# EAGLE board main_schematic1 (EAGLE 7.1.0)
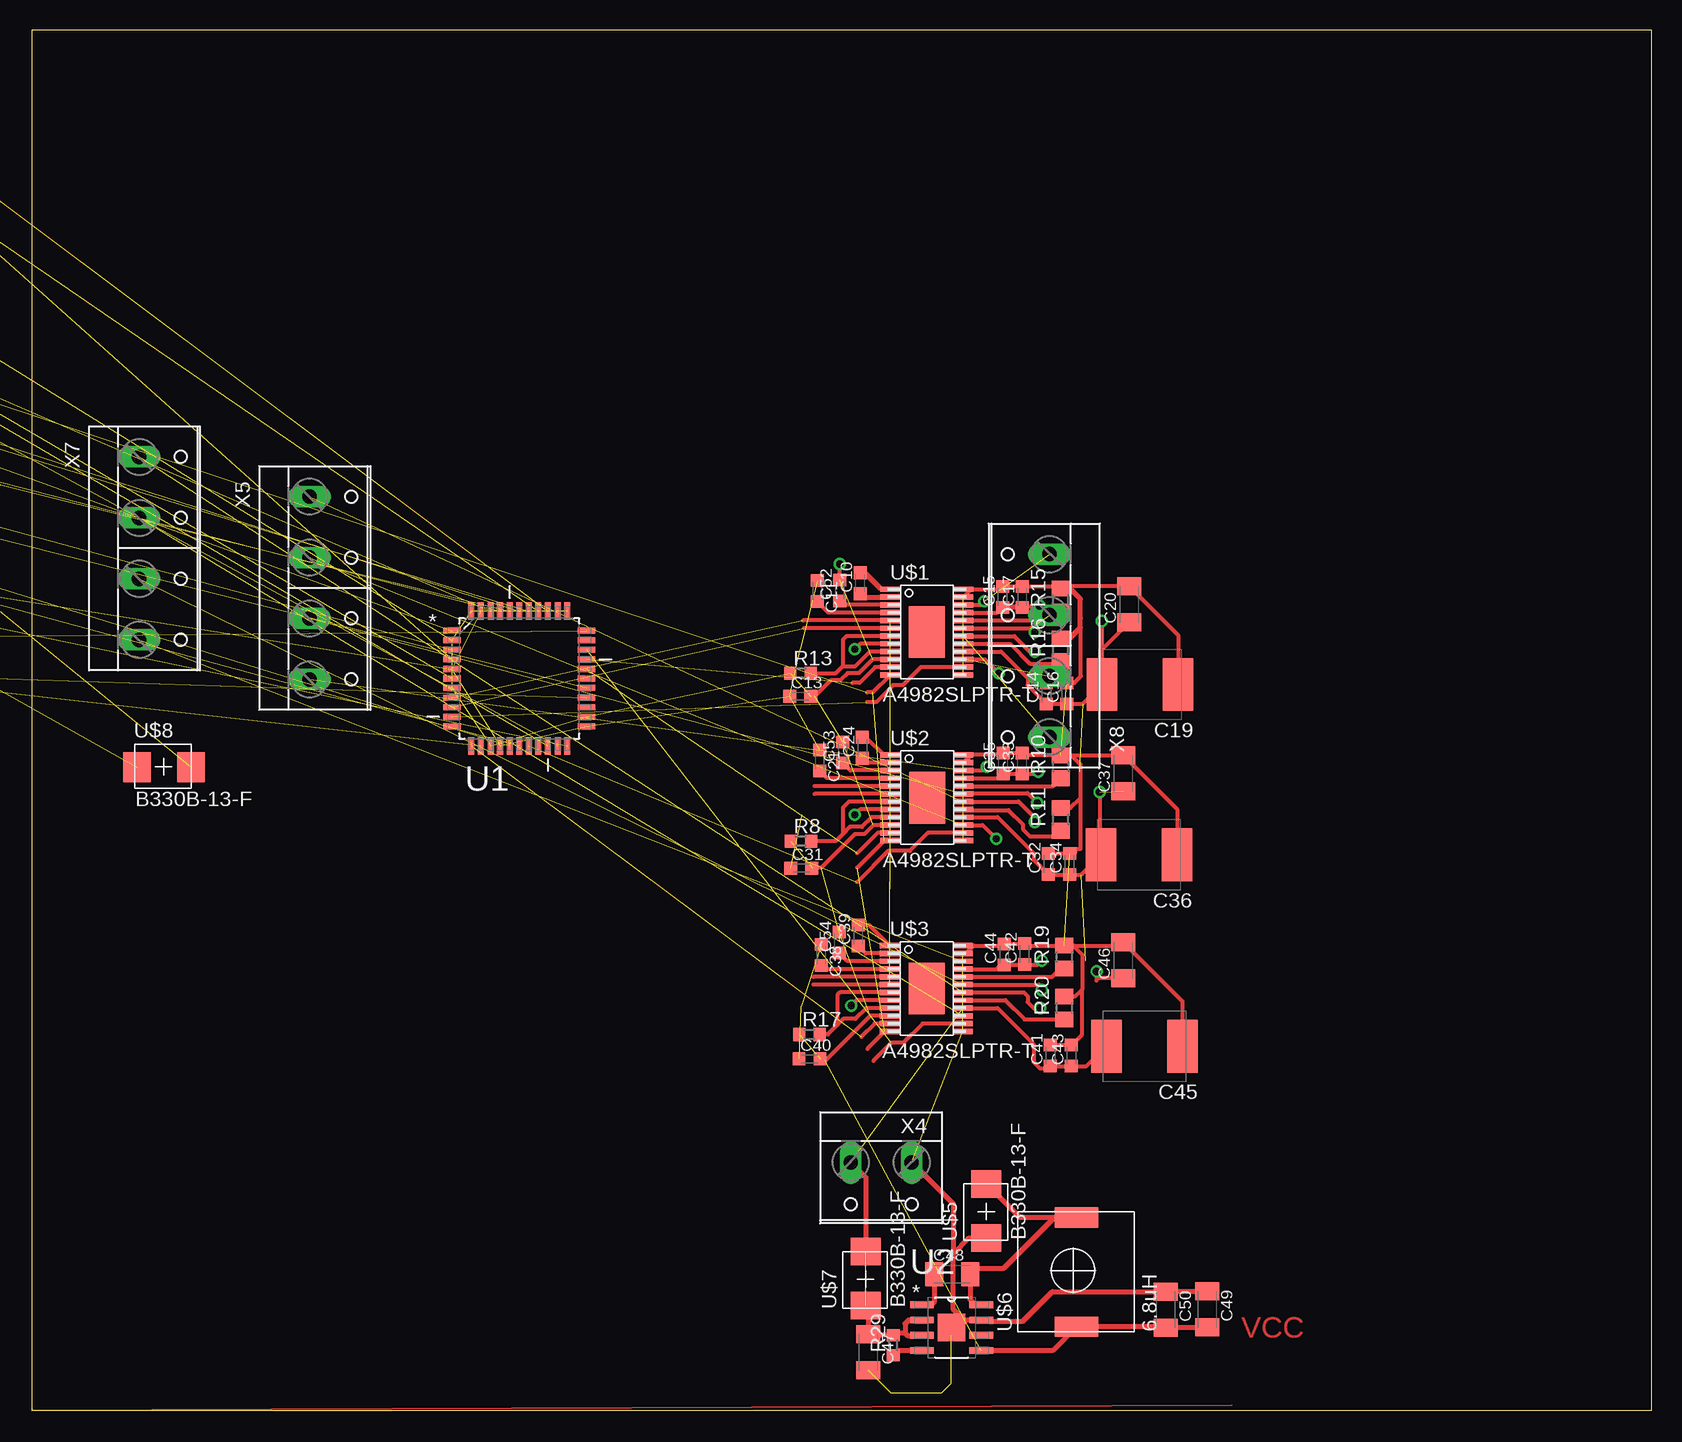
[diagram p0: board, top side]
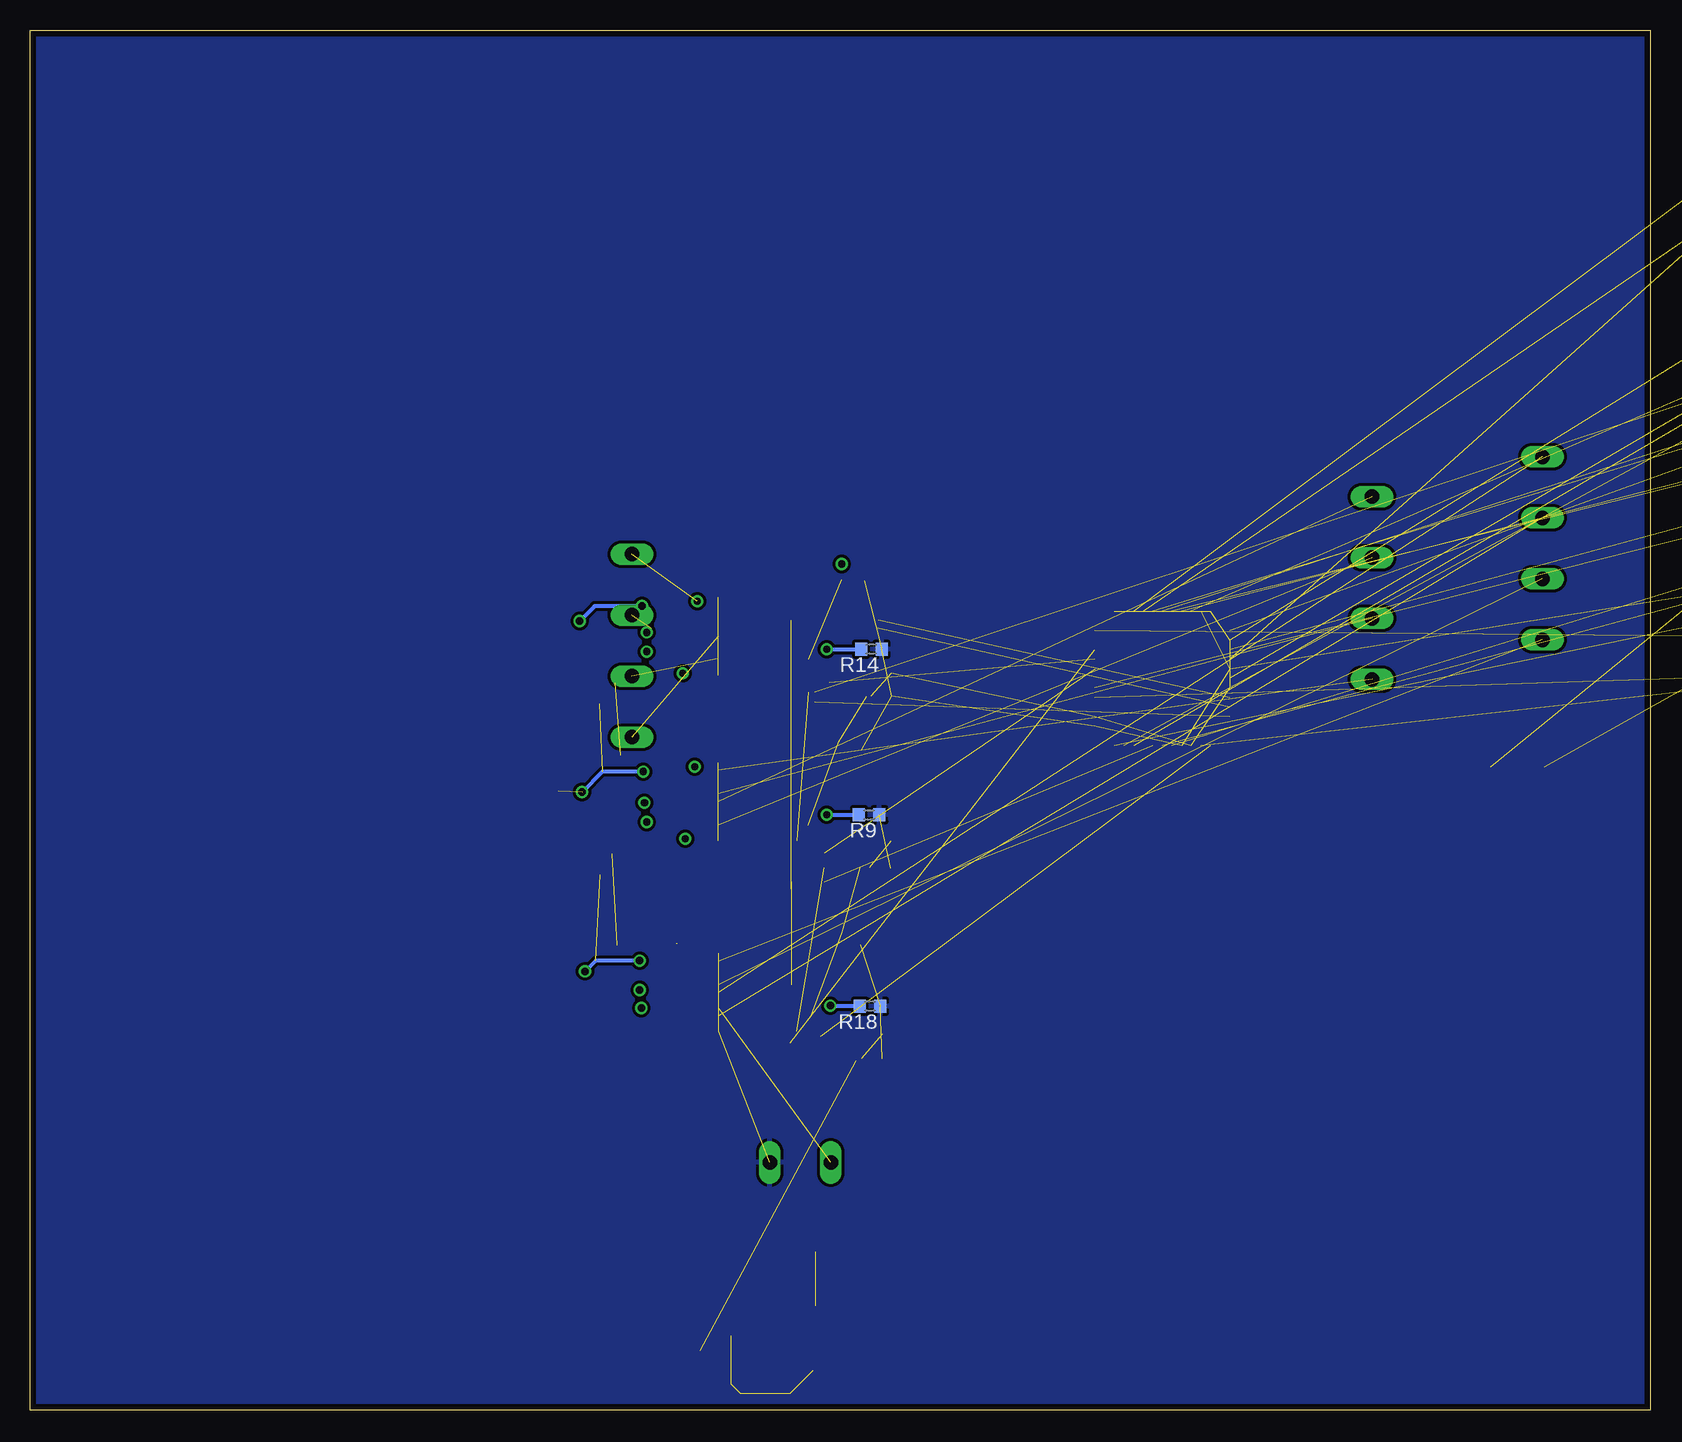
[diagram p1: board, bottom side, seen from below]

Size 135 x 115 mm. Coordinates in mm from the lower left corner, seen from the top.
Outline: 0,0 135,0 135,115 0,115 0,0
Copper layers (1*16): Top 0.035mm / dielectric 1.5mm / Bottom 0.035mm
Design rules "EDT_DRC": minimum track width 0.3mm, minimum drill 0.5mm, track to track 0.25mm, track to pad 0.25mm, pad to pad 0.25mm, via to via 0.25mm, smd to smd 0mil, copper to edge 0.5mm, drill to drill 8mil, minimum pad ring 10mil, minimum via ring 8mil, stop-mask expansion 4mil, vias tented up to drill 0mil, thermal gap 10mil

## Footprints (pad centres in the part's own frame; a part is rotated, then mirrored left to right if it is on the bottom)
C0603K = smd 1.05 x 1.08: 1 -0.875,0; 2 0.875,0
E/7260-38R = smd 2.55 x 4.4: + 3.175,0; - -3.175,0
C1206K = smd 1.5 x 2: 1 -1.5,0; 2 1.5,0
C0805 = smd 1.3 x 1.5: 1 -0.95,0; 2 0.95,0
USB-MINIB = smd 0.5 x 2.308: D+ 0,4.064; D- -0.8,4.064; GND 1.6,4.064; ID 0.8,4.064; VBUS -1.6,4.064 | smd 2 x 2.4: GND1 -4.4,-2; GND2 -4.4,3.5; GND3 4.4,3.5; GND4 4.4,-2 | hole 1: -2.2,1; 2.2,1
MC36214 = smd 1 x 2.8: P$1 0.239,1.4; P$2 3.196,1.39
1X04 = drill 1.016 long: 1 -3.81,0; 2 -1.27,0; 3 1.27,0; 4 3.81,0
1X02 = drill 1.016 long: 1 -1.27,0; 2 1.27,0
CHIP-LED0603 = smd 0.8 x 0.8: A 0,-0.75; C 0,0.75
SM49 = smd 5.08 x 1.778: 1 -4.826,0; 2 4.826,0
R0603 = smd 1 x 1.1: 1 -0.85,0; 2 0.85,0
R0805 = smd 1.3 x 1.5: 1 -0.95,0; 2 0.95,0
EVQ-Q2 = smd 3.2 x 1.2: A -3.4,-2; A' 3.4,-2; B -3.4,2; B' 3.4,2
QFP80P1200X1200X120-44N = smd 1.473 x 0.508: 1 -5.613,3.988; 2 -5.613,3.2; 3 -5.613,2.388; 4 -5.613,1.6; 5 -5.613,0.787; 6 -5.613,0; 7 -5.613,-0.787; 8 -5.613,-1.6; 9 -5.613,-2.388; 10 -5.613,-3.2; 11 -5.613,-3.988; 23 5.613,-3.988; 24 5.613,-3.2; 25 5.613,-2.388; 26 5.613,-1.6; 27 5.613,-0.787; 28 5.613,0; 29 5.613,0.787; 30 5.613,1.6; 31 5.613,2.388; 32 5.613,3.2; 33 5.613,3.988 | smd 0.508 x 1.473: 12 -3.988,-5.613; 13 -3.2,-5.613; 14 -2.388,-5.613; 15 -1.6,-5.613; 16 -0.787,-5.613; 17 0,-5.613; 18 0.787,-5.613; 19 1.6,-5.613; 20 2.388,-5.613; 21 3.2,-5.613; 22 3.988,-5.613; 34 3.988,5.613; 35 3.2,5.613; 36 2.388,5.613; 37 1.6,5.613; 38 0.787,5.613; 39 0,5.613; 40 -0.787,5.613; 41 -1.6,5.613; 42 -2.388,5.613; 43 -3.2,5.613; 44 -3.988,5.613
SOIC127P600X175-9N = smd 1.981 x 0.559: 1 -2.464,1.905; 2 -2.464,0.635; 3 -2.464,-0.635; 4 -2.464,-1.905; 5 2.464,-1.905; 6 2.464,-0.635; 7 2.464,0.635; 8 2.464,1.905 | smd 2.286 x 2.286: 9 0,0
TSSOP_24 = smd 1.65 x 0.45: P1 -3.175,3.67; P2 -3.175,3.02; P3 -3.175,2.37; P4 -3.175,1.72; P5 -3.175,1.07; P6 -3.175,0.42; P7 -3.175,-0.23; P8 -3.175,-0.88; P9 -3.175,-1.53; P10 -3.175,-2.18; P11 -3.175,-2.83; P12 -3.175,-3.48; P13 2.925,-3.48; P14 2.925,-2.83; P15 2.925,-2.18; P16 2.925,-1.53; P17 2.925,-0.88; P18 2.925,-0.23; P19 2.925,0.42; P20 2.925,1.07; P21 2.925,1.72; P22 2.925,2.37; P23 2.925,3.02; P24 2.925,3.67 | smd 3 x 4.32: P$1 -0.102,0.099
SFH6165 = smd 2.1 x 1.5: P1 -1.13,3.656; P2 -1.12,1.156; P3 7.446,1.156; P4 7.442,3.656
B330B-13-F = smd 2.3 x 2.5: P$1 -2.2,-0.022; P$2 2.299,-0.022
VLF10040 = smd 1.7 x 3.6: P$1 0.4,4.8; P$2 9.51,4.8
MICROMATCH-4 = drill 0.813: 1 1.905,1.27; 2 0.635,-1.27; 3 -0.635,1.27; 4 -1.905,-1.27
W237-132 = drill 1.194 long: 1 -2.54,-0.635; 2 2.54,-0.635
W237-4P = drill 1.194 long: 1 -7.62,-0.635; 2 -2.54,-0.635; 3 2.54,-0.635; 4 7.62,-0.635

## Placement (x,y rotation side)
C1  100nF  [C0603K]  -21.59,106.68 0 top  (outside the outline)
C2  100nF  [C0603K]  -27.94,106.68 0 top  (outside the outline)
C3  100nF  [C0603K]  -34.29,106.68 0 top  (outside the outline)
C4  100nF  [C0603K]  -40.64,106.68 0 top  (outside the outline)
C5  100nF  [C0603K]  -46.99,106.68 0 top  (outside the outline)
C6  100nF  [C0603K]  -53.34,106.68 0 top  (outside the outline)
C7  1uF  [C0603K]  -59.69,116.84 0 top  (outside the outline)
C8  18pF  [C0603K]  -27.94,116.84 0 top  (outside the outline)
C9  18pF  [C0603K]  -33.02,116.84 0 top  (outside the outline)
C10  100nF  [C0603K]  69.05,68.9 90 top
C11  220nF  [C0603K]  65.48,68.24 270 top
C12  100nF  [C0603K]  -72.39,106.68 0 top  (outside the outline)
C13  100nF  [C0603K]  64.06,59.48 0 top
C14  100nF  [C0603K]  84.57,59.71 90 top
C15  100nF  [C0603K]  80.92,67.76 90 top
C16  1uF  [C0603K]  86.26,59.72 90 top
C17  1uF  [C0603K]  82.56,67.76 90 top
C18  100nF  [C0603K]  -97.79,106.68 0 top  (outside the outline)
C19  100uF  [E/7260-38R]  92.37,60.46 180 top
C20  10uF  [C1206K]  91.48,67.13 90 top
C21  220nF  [C0603K]  65.68,54.14 270 top
C22  100nF  [C0603K]  -16.51,111.76 0 top  (outside the outline)
C23  100nF  [C0603K]  -22.86,111.76 0 top  (outside the outline)
C24  100nF  [C0603K]  69.24,55.19 90 top
C25  100nF  [C0603K]  -35.56,111.76 0 top  (outside the outline)
C26  100nF  [C0603K]  -41.91,111.76 0 top  (outside the outline)
C27  100nF  [C0603K]  -48.26,111.76 0 top  (outside the outline)
C28  100nF  [C0603K]  -54.61,111.76 0 top  (outside the outline)
C29  100nF  [C0603K]  -60.96,111.76 0 top  (outside the outline)
C30  100nF  [C0603K]  -67.31,111.76 0 top  (outside the outline)
C31  100nF  [C0603K]  64.14,45.16 0 top
C32  100nF  [C0603K]  84.74,45.49 90 top
C33  100nF  [C0603K]  82.54,53.89 90 top
C34  1uF  [C0603K]  86.5,45.5 90 top
C35  1uF  [C0603K]  80.96,53.89 90 top
C36  100uF  [E/7260-38R]  92.28,46.26 180 top
C37  10uF  [C1206K]  90.98,53.05 90 top
C38  220nF  [C0603K]  65.81,37.91 270 top
C39  100nF  [C0603K]  68.89,39.54 90 top
C40  100nF  [C0603K]  64.84,29.26 0 top
C41  100nF  [C0603K]  84.91,29.54 90 top
C42  100nF  [C0603K]  82.76,37.99 90 top
C43  1uF  [C0603K]  86.66,29.53 90 top
C44  1uF  [C0603K]  81.06,37.97 90 top
C45  100uF  [E/7260-38R]  92.74,30.31 180 top
C46  10uF  [C1206K]  90.98,37.47 90 top
C47  10uF  [C1206K]  69.72,4.81 270 top
C48  100nF  [C1206K]  76.71,11.32 0 top
C49  22uF  [C1206K]  97.97,8.39 270 top
C50  22uF  [C1206K]  94.52,8.37 270 top
C51  10uF  [C0805]  -50.8,87.63 0 top  (outside the outline)
C52  100nF  [C0603K]  67.35,68.3 90 top
C53  100nF  [C0603K]  67.6,54.8 90 top
C54  100nF  [C0603K]  67.3,38.95 90 top
CN1  [USB-MINIB]  -19.05,66.04 0 top  (outside the outline)
F1  MC36214  [MC36214]  -64.77,115.57 0 top  (outside the outline)
JP1  [1X04]  -19.05,95.25 0 top  (outside the outline)
JP2  [1X02]  -27.94,95.25 0 top  (outside the outline)
LED1  [CHIP-LED0603]  -91.44,85.09 0 top  (outside the outline)
LED2  [CHIP-LED0603]  -95.25,85.09 0 top  (outside the outline)
Q2  16MHz  [SM49]  -40.64,78.74 0 top  (outside the outline)
R1  10k  [R0603]  -77.47,101.6 0 top  (outside the outline)
R2  0.33k  [R0603]  -80.01,96.52 0 top  (outside the outline)
R3  22  [R0603]  -106.68,101.6 0 top  (outside the outline)
R4  22  [R0603]  -15.24,106.68 0 top  (outside the outline)
R5  10k  [R0603]  -82.55,101.6 0 top  (outside the outline)
R6  10k  [R0603]  -87.63,101.6 0 top  (outside the outline)
R7  10k  [R0603]  -92.71,101.6 0 top  (outside the outline)
R8  10k  [R0603]  64.11,47.4 0 top
R9  10k  [R0603]  65.07,49.6 180 bottom
R10  0.1  [R0805]  85.78,53.6 90 top
R11  0.1  [R0805]  85.77,49.22 90 top
R12  10k  [R0603]  -102.87,96.52 0 top  (outside the outline)
R13  10k  [R0603]  64.09,61.4 0 top
R14  10k  [R0603]  64.89,63.4 180 bottom
R15  0.1  [R0805]  85.77,67.5 90 top
R16  0.1  [R0805]  85.77,63.35 90 top
R17  10k  [R0603]  64.83,31.3 0 top
R18  10k  [R0603]  65,33.65 180 bottom
R19  0.1  [R0805]  86.07,37.75 90 top
R20  0.1  [R0805]  86.07,33.5 90 top
R21  1k  [R0603]  -36.83,101.6 0 top  (outside the outline)
R22  1k  [R0603]  -41.91,101.6 0 top  (outside the outline)
R23  330  [R0603]  -46.99,101.6 0 top  (outside the outline)
R24  10k  [R0603]  -52.07,101.6 0 top  (outside the outline)
R25  10k  [R0603]  -57.15,101.6 0 top  (outside the outline)
R26  10k  [R0603]  -62.23,101.6 0 top  (outside the outline)
R27  3.9k  [R0603]  -97.79,96.52 0 top  (outside the outline)
R28  180  [R0603]  -67.31,101.6 0 top  (outside the outline)
R29  100k  [R0603]  71.8,5.4 90 top
SW7  SPST_TACT-EVQQ2  [EVQ-Q2]  -52.07,66.04 0 top  (outside the outline)
SW8  SPST_TACT-EVQQ2  [EVQ-Q2]  -72.39,66.04 0 top  (outside the outline)
SW9  SPST_TACT-EVQQ2  [EVQ-Q2]  -92.71,66.04 0 top  (outside the outline)
U1  ATMEGA32U4-AU  [QFP80P1200X1200X120-44N]  40.64,60.96 0 top
U2  ADP2302ARDZ-5.0-R7  [SOIC127P600X175-9N]  76.67,6.86 0 top
U$1  A4982SLPTR-T  [TSSOP_24]  74.72,64.73 0 top
U$2  A4982SLPTR-T  [TSSOP_24]  74.73,50.93 0 top
U$3  A4982SLPTR-T  [TSSOP_24]  74.69,35.03 0 top
U$4  SFH6156  [SFH6165]  -106.68,85.09 0 top  (outside the outline)
U$5  B330B-13-F  [B330B-13-F]  79.55,16.54 90 top
U$6  6.8uH  [VLF10040]  91.87,6.54 90 top
U$7  B330B-13-F  [B330B-13-F]  69.5,10.9 90 top
U$8  B330B-13-F  [B330B-13-F]  11,53.6 0 top
X1  MICROMATCH-4  [MICROMATCH-4]  -87.63,77.47 0 top  (outside the outline)
X2  MICROMATCH-4  [MICROMATCH-4]  -25.4,88.9 0 top  (outside the outline)
X3  MICROMATCH-4  [MICROMATCH-4]  -43.18,88.9 0 top  (outside the outline)
X4  [W237-132]  70.8,20 180 top
X5  [W237-4P]  23.8,68.5 270 top
X7  [W237-4P]  9.6,71.8 270 top
X8  [W237-4P]  84.2,63.7 90 top

## Library data of the parts
C1-C54 R1-R29 = rcl
CN1 LED1 LED2 SW7-SW9 = adafruit
F1 = PTC
JP1 JP2 = pinhead
Q2 = crystal; OC_FARNELL: unknown; OC_NEWARK: unknown
U1 = ATmega32U4; MPN: ATMEGA32U4-AU; OC_FARNELL: 1748525; OC_NEWARK: 26R5633; PACKAGE: TQFP-44; SUPPLIER: Atmel
U2 = ADP2302ARDZ-5.0-R7; MPN: ADP2302ARDZ-5.0-R7; OC_FARNELL: 2312892; OC_NEWARK: 67W2704; PACKAGE: SOIC-8; SUPPLIER: Analog Devices
U$1-U$3 = Allegro_A4982_driver
U$4 = SFH6156
U$5 U$7 U$8 = schottky_B330B-13-F
U$6 = InductorVLF10040
X1-X3 = con-amp-micromatch; MPN: 7-215464-4; OC_FARNELL: 3784629; OC_NEWARK: 19R8124
X4 X5 X7 X8 = con-wago-508; OC_FARNELL: unknown; OC_NEWARK: unknown

## Nets
ANALOG: C12.2 R27.1 U$1.P12 U$2.P12 U$3.P12
DEBUG_LED: LED2.A U1.22
DIR1: U1.10 U$1.P14
DIR2: U1.18 U$2.P14
DIR3: U1.31 U$3.P14
GND: C1.2 C2.2 C3.2 C4.2 C5.2 C6.2 C7.2 C8.2 C9.2 C11.1 C12.1 C13.1 C14.2 C15.2 C16.2 C17.2 C18.1 C18.2 C19.- C20.2 C21.1 C22.2 C23.2 C25.2 C26.2 C27.2 C28.2 C29.2 C30.2 C31.1 C32.2 C33.2 C34.2 C35.2 C36.- C37.2 C38.1 C40.1 C41.2 C42.2 C43.2 C44.2 C45.- C46.2 C47.2 C49.1 C50.1 C51.2 CN1.GND JP1.3 LED1.C R9.1 R10.2 R11.2 R14.1 R15.2 R16.2 R18.1 R19.2 R20.2 R23.2 SW7.B SW8.A SW9.B U1.5 U1.15 U1.23 U1.35 U1.43 U2.7 U$1.P13 U$1.P23 U$1.P24 U$2.P13 U$2.P23 U$2.P24 U$3.P13 U$3.P23 U$3.P24 U$4.P2 U$5.P$1 X1.1 X1.3 X2.1 X2.3 X3.1 X3.3 X4.1
HIGH_VOLTAGE: C14.1 C15.1 C16.1 C17.1 C19.+ C20.1 C32.1 C33.1 C34.1 C35.1 C36.+ C37.1 C41.1 C42.1 C43.1 C44.1 C45.+ C46.1 C47.1 R29.2 U2.2 U2.3 U$1.P16 U$1.P21 U$2.P16 U$2.P21 U$3.P16 U$3.P21 U$7.P$1 U$7.P$2 X4.2
HWB: C29.1 R5.1 SW7.A U1.33
KILL1: C28.1 R25.1 U1.41 X3.2
KILL2: C27.1 R26.1 U1.40 X3.4
KILL3: C26.1 R12.1 U1.39 X2.2
KILL4: C25.1 R24.1 U1.38 X2.4
KILL5: C23.1 R6.1 U1.37 X1.2
KILL6: C22.1 R7.1 U1.36 X1.4
MS1: U1.8 U$1.P5 U$2.P5 U$3.P5
MS2: U1.9 U$1.P6 U$2.P6 U$3.P6
N$1: JP2.1 U$4.P4
N$2: C6.1 U1.42
N$3: LED1.A R2.2
N$4: CN1.D- R3.1
N$5: CN1.D+ R4.1
N$6: C10.2 U$1.P1
N$7: C10.1 U$1.P2
N$8: U$1.P15 X8.2
N$9: U$1.P22 X8.4
N$10: C11.2 U$1.P4
N$11: C7.1 U1.6
N$12: R13.2 U$1.P7 U$1.P9
N$13: C24.2 U$2.P1
N$14: R14.2 U$1.P8
N$15: R15.1 U$1.P20
N$16: R16.1 U$1.P17
N$17: C24.1 U$2.P2
N$18: U$1.P19 X8.3
N$19: R10.1 U$2.P20
N$20: U$1.P18 X8.1
N$21: R11.1 U$2.P17
N$22: U$2.P22 X5.4
N$23: U$2.P18 X5.1
N$24: U$2.P19 X5.3
N$25: U$2.P15 X5.2
N$26: C21.2 U$2.P4
N$27: R8.2 U$2.P7 U$2.P9
N$28: R9.2 U$2.P8
N$29: C39.2 U$3.P1
N$30: C39.1 U$3.P2
N$31: R19.1 U$3.P20
N$32: R20.1 U$3.P17
N$33: U$3.P22 X7.4
N$34: U$3.P18 X7.1
N$35: U$3.P19 X7.3
N$36: U$3.P15 X7.2
N$37: C38.2 U$3.P4
N$38: R17.2 U$3.P7 U$3.P9
N$39: CN1.VBUS U$8.P$1
N$40: JP1.1 R21.1
N$41: JP1.2 R22.1
N$42: JP2.2 U$4.P3
N$43: R18.2 U$3.P8
N$44: LED2.C R23.1
N$45: R29.1 U2.4
N$47: C48.1 U2.1
N$48: R28.1 U$4.P1
N$49: F1.P$1 U$8.P$2
N$50: C52.1 U$1.P3
N$51: C48.2 U2.8 U$5.P$2 U$6.P$2
N$52: C53.1 U$2.P3
N$53: C54.1 U$3.P3
SHUTTER: R28.2 U1.1
START/STOP: SW9.A U1.26
STEP1: U1.30 U$1.P11
STEP2: U1.29 U$2.P11
STEP3: U1.12 U$3.P11
T0/OC4D: R27.2 U1.27
UART_RX: R21.2 U1.20
UART_TX: R22.2 U1.21
USB_D+: R4.2 U1.4
USB_D-: R3.2 U1.3
VCC: C1.1 C2.1 C3.1 C4.1 C5.1 C13.2 C31.2 C40.2 C49.2 C50.2 C51.1 C52.2 C53.2 C54.2 F1.P$2 JP1.4 R1.2 R2.1 R5.2 R6.2 R7.2 R8.1 R12.2 R13.1 R17.1 R24.2 R25.2 R26.2 U1.2 U1.7 U1.14 U1.24 U1.34 U1.44 U2.5 U$1.P10 U$2.P10 U$3.P10 U$6.P$1
XTAL1: C8.1 Q2.1 U1.17
XTAL2: C9.1 Q2.2 U1.16
~RESET: C30.1 R1.1 SW8.B U1.13

## Tracks (layer width: path | path; a pad name or v marks a point on that pad's centre or on a via)
ANALOG  (4 unrouted)
  Top 0.35: U$1.P12 70.09,59.8 69.6,59.8 | U$2.P12 71.05,47.45 68.8,45.2 | U$3.P12 71.1,31.55 69.65,30.1
DEBUG_LED  (1 unrouted)
DIR1  (1 unrouted)
  Top 0.35: U$1.P14 74.1,61.9 72.6,60.4 71.8,60.4 70.4,59 69.6,59
DIR2  (1 unrouted)
  Top 0.35: U$2.P14 74.7,48.1 73.2,46.6 71.4,46.6 68.8,44
DIR3  (1 unrouted)
  Top 0.35: U$3.P14 74.25,32.2 72.65,30.6 71.65,30.6 70.15,29.1
GND  (57 unrouted)
  Top 0.35: U$1.P24 78.3,68.4 | 78.3,68.4 80.69,68.4 C15.2 C17.2 85.58,68.64 | U$1.P23 78.3,68.4 | C33.2 C35.2 80.86,54.66 78.37,54.66 | C33.2 82.66,54.65 | U$2.P24 77.72,54.66 78.37,54.66 | U$2.P23 78.37,54.66 | C33.2 82.75,54.55 R10.2 86.65,54.55 | 86.65,54.55 87.4,53.8 87.4,51 | R11.2 86.57,50.17 87.4,51 | R15.2 85.95,68.63 C20.2 95.55,64.56 C19.- | C14.2 C16.2 86.89,60.59 87.45,61.15 87.45,65.95 87.4,66 | 86.65,54.55 C37.2 95.45,50.08 C36.- | U$3.P24 78.5,38.7 | 78.5,38.7 80.97,38.7 81.13,38.87 C42.2 82.92,38.7 R19.2 | U$3.P23 77.85,38.05 78.5,38.7 | R19.2 90.71,38.7 C46.2 95.92,34.03 C45.- | 86.06,38.72 R19.2 | 87.5,35 87.55,35.05 87.55,37.95 86.8,38.7 R19.2 | R20.2 86.95,34.45 87.5,35 | 87.4,51 87.4,46.75 86.88,46.75 C34.2 | 87.5,35 87.5,31.25 C43.2 C41.2 | C34.2 86.88,46.38 87,46.5 | C34.2 C32.2
  Top 0.406: U2.7 77.7,7.5 76.8,8.4 76.8,13 | U2.7 77.89,7.5 76.6,6.2 | U2.7 79.23,7.4 82.6,7.4 85.07,9.87 C50.1 97.95,9.87 C49.1 | 76.8,13 78.14,14.34 U$5.P$1 | X4.1 76.8,17.18 76.8,13 | 85.58,68.64 R15.2 86.55,68.45 87.4,67.6 87.4,66 87.4,65.2 86.5,64.3 R16.2
  pour Bottom: 0,0 134.5,0 134.5,114.5 0,114.5
HIGH_VOLTAGE  (via drill 0.6)  (6 unrouted)
  Top 0.35: C17.1 C15.1 80.48,66.45 U$1.P21 80.45,66.45 80.8,66.8 | 80.8,66.8 81,66.8 81.2,67 v84,67 81,67 80.8,66.8 | C35.1 C33.1 83.72,53.02 v83.9,53.2 | 80.69,52.75 C35.1 | U$2.P21 80.59,52.65 C35.1 | C20.1 89.19,63.34 | U$1.P16 80.8,63.2 83,61 83,60.41 C14.1 C16.1 87.58,58.84 C19.+ 89.19,63.34 | U$2.P16 80.5,49.4 83.52,46.38 83.52,45.84 C32.1 C34.1 87.47,44.62 C36.+ 89,46.37 v89,51.5 | U$3.P21 80.4,36.75 80.75,37.09 C44.1 81.08,37.12 C42.1 83.86,37.12 v84.2,37.45 | v88.75,36.55 88.75,36 | 88.75,36 88.75,35.8 | U$3.P16 80.5,33.5 83.5,30.5 83.5,29 84,28.5 84.75,28.5 C41.1 C43.1 87.91,28.66 C45.+ | C46.1 88.78,35.97 88.75,36 | v89.2,65.75 v89.19,65.75 89.19,63.34
  Top 0.406: U2.2 73.09,7.5 72.8,7.2 72.8,6.4 | 73.22,6.22 U2.3 74.18,6.2 73,6.2 72.8,6.4 | C47.1 69.68,6.33 | U$7.P$1 69.72,8.5 C47.1 | X4.2 69.52,19.37 U$7.P$2 | 72.8,6.4 71.95,6.4 R29.2 69.78,6.25 C47.1
  Bottom 0.35: v84.2,37.45 87.85,37.45 v88.75,36.55 | v83.9,53.2 87.3,53.2 v89,51.5 | v84,67 87.95,67 v89.2,65.75
HWB  (3 unrouted)
KILL1  (3 unrouted)
KILL2  (3 unrouted)
KILL3  (3 unrouted)
KILL4  (3 unrouted)
KILL5  (3 unrouted)
KILL6  (3 unrouted)
MS1  (3 unrouted)
  Top 0.35: U$1.P5 64.3,65.8 | U$2.P5 65.25,52 | U$3.P5 65.15,36.1
MS2  (3 unrouted)
  Top 0.35: U$1.P6 64.35,65.15 | U$2.P6 65.25,51.35 | U$3.P6 65.15,35.45
N$1  (1 unrouted)
N$2  (1 unrouted)
N$3  (1 unrouted)
N$4  (1 unrouted)
N$5  (1 unrouted)
N$6
  Top 0.406: U$1.P1 70.83,68.4 69.45,69.78 C10.2
N$7
  Top 0.406: C10.1 69.33,67.75 U$1.P2
N$8  (via drill 0.6)  (1 unrouted)
  Top 0.35: U$1.P15 79.45,62.55 v80.6,61.4
  Top 0.406: U$1.P15 77.69,62.6
N$9  (via drill 0.6)  (1 unrouted)
  Top 0.35: U$1.P22 79.1,67.1 v79.4,67.4
N$10
  Top 0.35: U$1.P4 66.39,66.45 C11.2
N$11  (1 unrouted)
N$12
  Top 0.35: U$1.P7 67.9,64.5 67.6,64.2 67.6,62 | 67.6,62 68.65,62 69.85,63.2 U$1.P9 | R13.2 67,61.4 67.6,62
N$13
  Top 0.35: C24.2 69.53,56.06 71,54.6 U$2.P1
N$14  (via drill 0.6)
  Top 0.35: U$1.P8 69.05,63.85 v68.6,63.4
  Bottom 0.35: v68.6,63.4 R14.2
N$15
  Top 0.35: U$1.P20 85.02,65.8 R15.1
N$16
  Top 0.35: U$1.P17 81.55,63.85 83.2,62.2 85.57,62.2
  Top 0.406: 85.57,62.2 R16.1
N$17
  Top 0.35: U$2.P2 69.61,53.95 C24.1
N$18  (via drill 0.6)  (1 unrouted)
  Top 0.35: U$1.P19 83.25,65.15 v83.6,64.8
N$19
  Top 0.35: U$2.P20 85.13,52 R10.1
N$20  (via drill 0.6)  (1 unrouted)
  Top 0.35: U$1.P18 81.9,64.5 83.2,63.2 v83.6,63.2
N$21
  Top 0.35: U$2.P17 77.7,50 81.4,50 82.6,48.8 82.6,48.4 83.2,47.8 85.3,47.8 R11.1
N$22  (via drill 0.6)  (1 unrouted)
  Top 0.35: U$2.P22 79.3,53.3 v79.6,53.6
N$23  (via drill 0.6)  (1 unrouted)
  Top 0.35: U$2.P18 82.25,50.7 83.6,49.35 v83.6,49
N$24  (via drill 0.6)  (1 unrouted)
  Top 0.35: U$2.P19 77.7,51.4 83,51.4 v83.8,50.6
N$25  (via drill 0.6)  (1 unrouted)
  Top 0.35: U$2.P15 79.25,48.75 v80.4,47.6
N$26
  Top 0.35: U$2.P4 66.3,52.65 C21.2
N$27
  Top 0.35: U$2.P7 68.1,50.7 67.6,50.2 67.6,48 | 67.6,48 67,47.4 R8.2 | U$2.P9 70,49.4 69.2,48.6 68.2,48.6 67.6,48
N$28  (via drill 0.6)
  Top 0.35: U$2.P8 69.05,50.05 v68.6,49.6
  Bottom 0.35: v68.6,49.6 R9.2
N$29
  Top 0.35: U$3.P1 69.8,40.41 C39.2
N$30
  Top 0.35: U$3.P2 69.5,38.05 C39.1
N$31
  Top 0.35: U$3.P20 85.05,36.1 85.75,36.8 R19.1
N$32
  Top 0.35: U$3.P17 81.15,34.15 82.75,32.55 R20.1
N$33  (1 unrouted)
N$34  (1 unrouted)
  Top 0.35: U$3.P18 82.7,34.8 83,34.5 83,34 83.5,33.5 84,33.5
N$35  (via drill 0.6)  (1 unrouted)
  Top 0.35: U$3.P19 83.95,35.45 84.2,35.2 v84.2,35
N$36  (1 unrouted)
N$37
  Top 0.35: U$3.P4 66.09,36.75 C38.2
N$38
  Top 0.35: U$3.P9 69.55,33.5 68.65,32.6 67.65,32.6 67.15,32.1 | U$3.P7 67.35,34.8 67.15,34.6 67.15,32.1 | 67.15,32.1 66.35,31.3 R17.2
N$39  (1 unrouted)
N$40  (1 unrouted)
N$41  (1 unrouted)
N$42  (1 unrouted)
N$43  (via drill 0.6)
  Top 0.35: U$3.P8 68.75,34.15 v68.3,33.7
  Bottom 0.35: v68.3,33.7 65.9,33.7 R18.2
N$44  (1 unrouted)
N$45
  Top 0.406: U2.4 72.2,4.96 R29.1
N$47
  Top 0.406: C48.1 75.21,9.01 75,8.8 74.24,8.8 U2.1
N$48  (1 unrouted)
N$49  (1 unrouted)
N$50
  Top 0.35: 67.35,67.8 C52.1 67.67,67.1 U$1.P3
N$51
  Top 0.406: U2.8 79.1,8.8 78.6,8.8 78.21,9.19 C48.2 78.69,11.8 81,11.8 85.25,16.05 U$6.P$2 82.36,16.05 U$5.P$2
N$52
  Top 0.35: U$2.P3 68.22,53.3 C53.1
N$53
  Top 0.35: U$3.P3 67.97,37.4 C54.1
N$54  (via drill 0.6)
  other vias: 67.35,70.5
N$59  (via drill 0.6)
  other vias: 84.05,33.5
SHUTTER  (1 unrouted)
START/STOP  (1 unrouted)
STEP1  (1 unrouted)
  Top 0.35: U$1.P11 70.3,61.9 69,60.6 68.4,60.6
STEP2  (1 unrouted)
  Top 0.35: U$2.P11 70.5,48.1 68.8,46.4
STEP3  (1 unrouted)
  Top 0.35: U$3.P11 70.25,32.2 69.15,31.1
T0/OC4D  (1 unrouted)
UART_RX  (1 unrouted)
UART_TX  (1 unrouted)
USB_D+  (1 unrouted)
USB_D-  (1 unrouted)
VCC  (32 unrouted)
  Top 0.35: C52.2 67.35,70.4 | U$1.P10 70.1,62.55 68.95,61.4 68,61.4 67.4,60.8 66.6,60.8 65.28,59.48 C13.2 | U$2.P10 70.15,48.75 69.4,48 68.6,48 65.8,45.2 65.06,45.2 C31.2 | U$3.P10 69.9,32.85 66.15,29.1 65.88,29.1 C40.2
  Top 0.406: U2.5 85.08,4.96 U$6.P$1 94.45,6.94 C50.2 97.95,6.87 C49.2
XTAL1  (2 unrouted)
XTAL2  (2 unrouted)
~RESET  (3 unrouted)
(copper drawn outside any net)
  shapes: Top area x1

## Text on the board
Top: VCC